# EAGLE board EIC901_Etapa1_Tabla2_Tinkercad (EAGLE 9.7.0)

Size 218.04 x 50.81 mm. Coordinates in mm from the lower left corner, seen from the top.
Outline: 0,0 218.04,0 218.04,50.81 0,50.81 0,0
Copper layers (1*16): Top 0.035mm / dielectric 1.5mm / Bottom 0.035mm
Design rules "default": minimum track width 6mil, minimum drill 0.35mm, track to track 6mil, track to pad 6mil, pad to pad 6mil, via to via 6mil, smd to smd 6mil, copper to edge 40mil, drill to drill 6mil, minimum pad ring 10mil, minimum via ring 8mil, stop-mask expansion 4mil, vias tented up to drill 0mil, thermal gap 10mil

## Footprints (pad centres in the part's own frame; a part is rotated, then mirrored left to right if it is on the bottom)
LEDRD254W60D565H860B = drill 0.981 pad 1.581: 1 -1.27,0; 2 1.27,0
DIODE-AXIAL = drill 1: 1 -5.08,0; 2 5.08,0
MOTOR = drill 1.118 pad 3.15 octagon: + 2.54,0; - -2.54,0
BATTERY-GENERIC = drill 1.118 pad 3.15 octagon: + 2.54,0; - -2.54,0
RESAD1016W63L850D250B = drill 0.83 pad 1.43: 1 -5.08,0; 2 5.08,0
SWITCH-MOMENTARY-PTH-6.5MM = drill 1.016 pad 1.88: 1 -3.251,2.261; 2 3.251,2.261; 3 -3.251,-2.261; 4 3.251,-2.261
TO92 = drill 0.813 octagon: 1 -1.27,0; 2 0,1.905; 3 1.27,0
DIP762W53P254L1969H508Q14B = drill 0.743 pad 1.343: 1 -3.81,7.62; 2 -3.81,5.08; 3 -3.81,2.54; 4 -3.81,0; 5 -3.81,-2.54; 6 -3.81,-5.08; 7 -3.81,-7.62; 8 3.81,-7.62; 9 3.81,-5.08; 10 3.81,-2.54; 11 3.81,0; 12 3.81,2.54; 13 3.81,5.08; 14 3.81,7.62

## Placement (x,y rotation side)
D1  RED  [LEDRD254W60D565H860B]  121.21,24.93 180 top
D2  DIODEDIODE-AXIAL  [DIODE-AXIAL]  21.25,25.89 270 top
M1  MOTOR_HDR  [MOTOR]  10.11,10.11 120 top
P1  BATTERYGENERIC  [BATTERY-GENERIC]  25.96,42.56 180 top
R1  10k  [RESAD1016W63L850D250B]  169.14,27.51 90 top
R2  10k  [RESAD1016W63L850D250B]  192,27.51 90 top
R3  10k  [RESAD1016W63L850D250B]  209.78,27.51 90 top
R4  1k  [RESAD1016W63L850D250B]  94.54,27.47 0 top
R5  1k  [RESAD1016W63L850D250B]  49.5,29.93 90 top
SA  SWITCH_MOMENTARY  [SWITCH-MOMENTARY-PTH-6.5MM]  169.14,38.94 90 top
SB  SWITCH_MOMENTARY  [SWITCH-MOMENTARY-PTH-6.5MM]  192,38.94 90 top
SC  SWITCH_MOMENTARY  [SWITCH-MOMENTARY-PTH-6.5MM]  209.78,38.94 90 top
T1  NPN  [TO92]  49.63,44.68 0 top
U1  74HC04_PDIP  [DIP762W53P254L1969H508Q14B]  86.92,38.9 90 top
U2  74HC08_PDIP  [DIP762W53P254L1969H508Q14B]  109.78,38.9 90 top
U3  74HC32_PDIP  [DIP762W53P254L1969H508Q14B]  132.64,38.9 90 top

## Library data of the parts
D1 = Tinkercad; CATEGORY: Opto-Electronic; SUB-CATEGORY: LED; VALUE: LED_RED
D2 M1 P1 R1-R5 SA SB SC U1-U3 = Tinkercad
T1 = Tinkercad; CATEGORY: Transistor; SUB-CATEGORY: BJT; TYPE: NPN

## Nets
D1_C: D1.2 R4.2
M1_-: D2.1 M1.- T1.1
P1+: D2.2 M1.+ P1.+ SA.3 SA.4 SB.3 SB.4 SC.3 SC.4 U1.14 U2.14 U3.14
P1-: P1.- R1.1 R2.1 R3.1 R4.1 T1.3 U1.5 U1.7 U2.7 U3.7
T1_B: R5.2 T1.2
U1_1A: R3.2 SC.1 SC.2 U1.1
U1_1Y: U1.2 U2.4
U2_1A: R1.2 SA.1 SA.2 U2.1 U3.1
U2_1B: R2.2 SB.1 SB.2 U2.2 U3.2
U2_1Y: U2.3 U3.4
U2_2Y: U2.6 U3.5
U3_1Y: U2.5 U3.3
U3_2Y: D1.1 R5.1 U3.6

## Tracks (layer width: path | path; a pad name or v marks a point on that pad's centre or on a via)
D1_C  (1 unrouted)
M1_-  (2 unrouted)
P1+  (11 unrouted)
P1-  (9 unrouted)
T1_B  (1 unrouted)
U1_1A  (3 unrouted)
U1_1Y  (1 unrouted)
U2_1A  (4 unrouted)
U2_1B  (4 unrouted)
U2_1Y  (1 unrouted)
U2_2Y  (1 unrouted)
U3_1Y  (1 unrouted)
U3_2Y  (2 unrouted)